# EAGLE board BeeBeeAte-RemoteBoard (EAGLE 9.6.2)
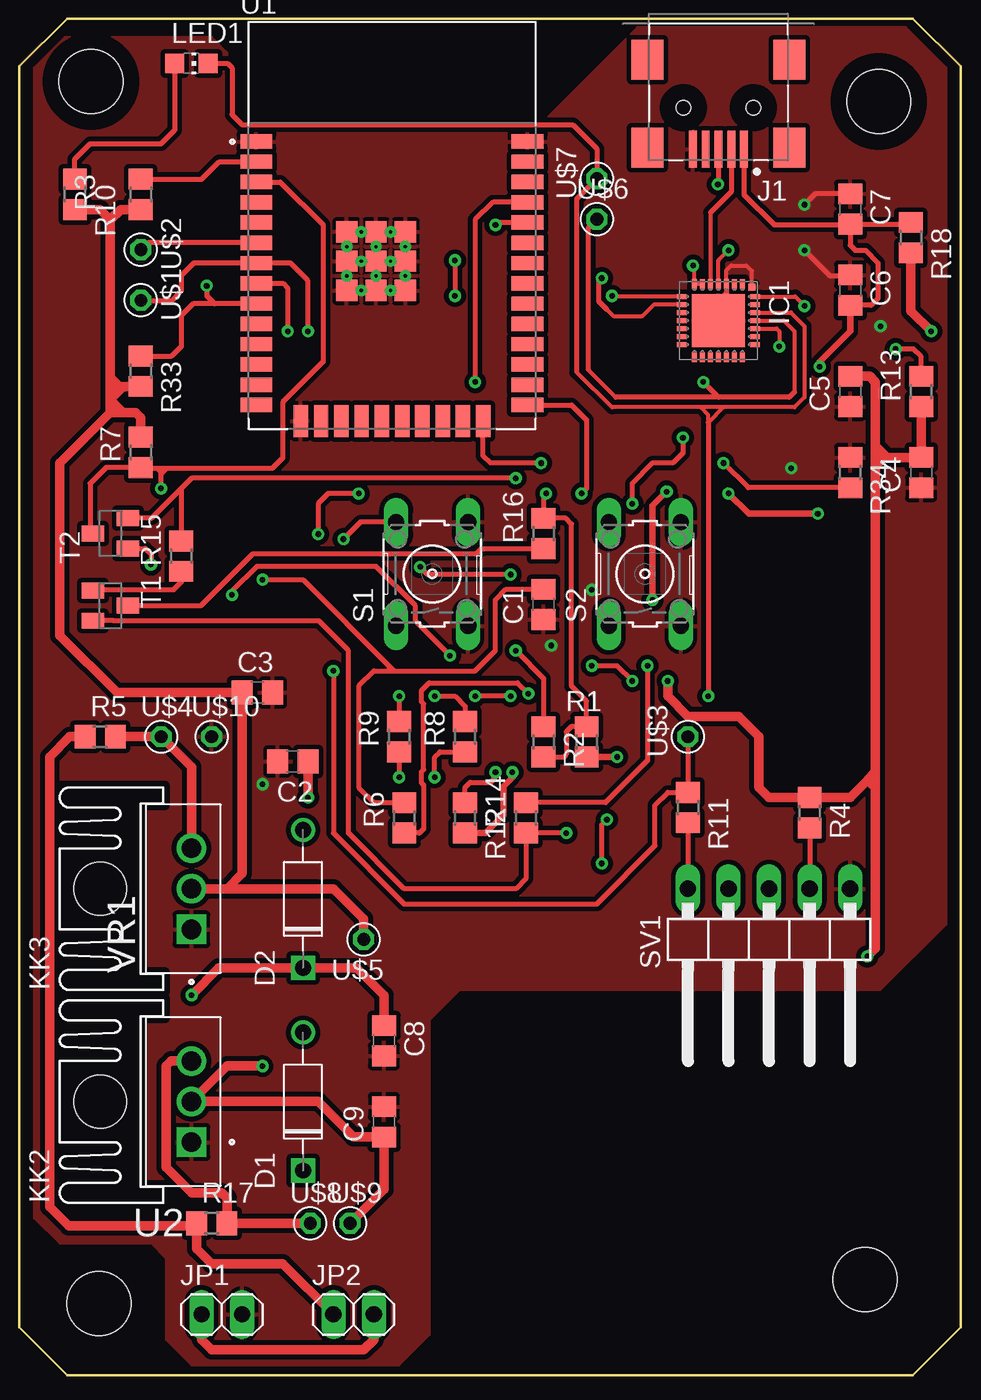
[diagram p0: board, top side]
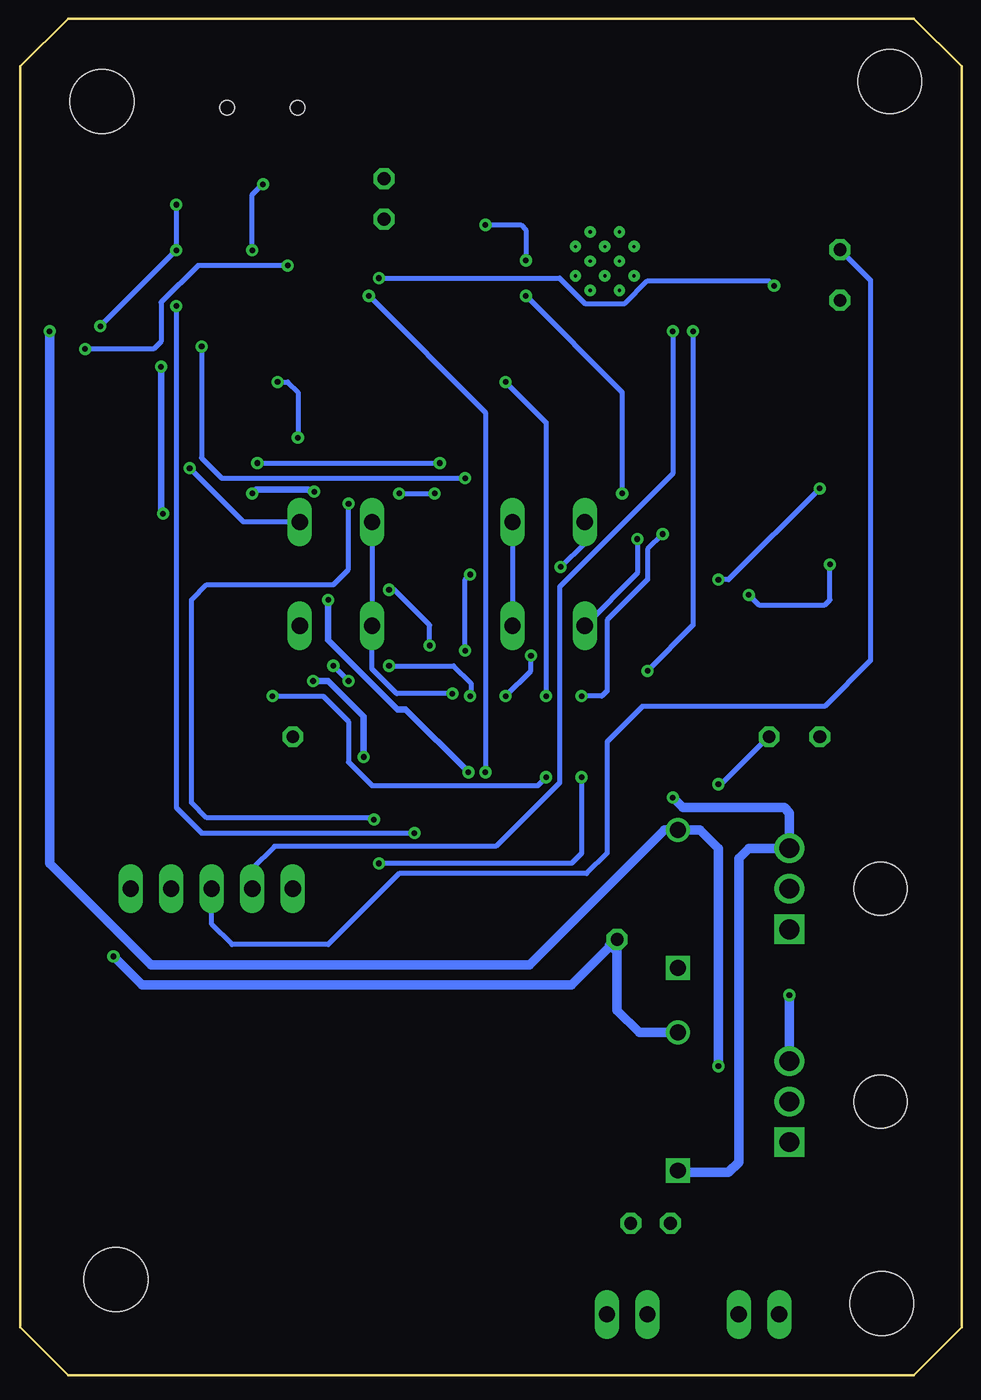
[diagram p1: board, bottom side, seen from below]

No outline drawn. Coordinates in mm, seen from the top.
Copper layers (1*16): Top 0.035mm / dielectric 1.5mm / Bottom 0.035mm
Design rules "default *": minimum track width 6mil, minimum drill 0.35mm, track to track 12mil, track to pad 12mil, pad to pad 12mil, via to via 12mil, smd to smd 12mil, copper to edge 40mil, drill to drill 12mil, minimum pad ring 10mil, minimum via ring 8mil, stop-mask expansion 4mil, vias tented up to drill 0mil, thermal gap 10mil
Holes 4 mm at 4.5,81.05 53.87,79.8 53,6 5,4.5
Milling: 8 lines

## Footprints (pad centres in the part's own frame; a part is rotated, then mirrored left to right if it is on the bottom)
C0805 = smd 1.3 x 1.5: 1 -0.95,0; 2 0.95,0
DO-41 = drill 1: A 4.325,0 | drill 1 square: C -4.325,0
MLP28 = smd 0.6 x 0.3: 1 -2.3,1.5; 2 -2.3,1; 3 -2.3,0.5; 4 -2.3,0; 5 -2.3,-0.5; 6 -2.3,-1; 7 -2.3,-1.5; 15 2.3,-1.5; 16 2.3,-1; 17 2.3,-0.5; 18 2.3,0; 19 2.3,0.5; 20 2.3,1; 21 2.3,1.5 | smd 0.3 x 0.6: 8 -1.5,-2.3; 9 -1,-2.3; 10 -0.5,-2.3; 11 0,-2.3; 12 0.5,-2.3; 13 1,-2.3; 14 1.5,-2.3; 22 1.5,2.3; 23 1,2.3; 24 0.5,2.3; 25 0,2.3; 26 -0.5,2.3; 27 -1,2.3; 28 -1.5,2.3 | smd 3.3 x 3.3: EXP 0,0 | smd 0.435 x 0.435: M -2.103,2.103
TE_3-1734035-2 = smd 0.5 x 2.3: 1 -1.6,2.6; 2 -0.8,2.6; 3 0,2.6; 4 0.8,2.6; 5 1.6,2.6 | smd 2 x 2.5: SH1 -4.45,2.5; SH2 4.45,2.5; SH3 -4.45,-3; SH4 4.45,-3 | hole 0.9: -2.2,0; 2.2,0
1X02 = drill 1.016 long: 1 -1.27,0; 2 1.27,0
SK95-2M3 = hole 3.302: 0,2.54
CHIP-LED0805 = smd 1.2 x 1.2: A 0,-1.05; C 0,1.05
R0805 = smd 1.3 x 1.5: 1 -0.95,0; 2 0.95,0
B3F-10XX = drill 1.016 long: 1 -3.251,2.261; 2 3.251,2.261; 3 -3.251,-2.261; 4 3.251,-2.261
1X05/90 = drill 1.016 long: 1 -5.08,-3.81; 2 -2.54,-3.81; 3 0,-3.81; 4 2.54,-3.81; 5 5.08,-3.81
SOT23-BEC = smd 1 x 1.4: B -0.95,-1.1; C 0,1.1; E 0.95,-1.1
MODULE_ESP32-WROOM-32 = smd 2 x 0.9: 1 -8.5,5.26; 2 -8.5,3.99; 3 -8.5,2.72; 4 -8.5,1.45; 5 -8.5,0.18; 6 -8.5,-1.09; 7 -8.5,-2.36; 8 -8.5,-3.63; 9 -8.5,-4.9; 10 -8.5,-6.17; 11 -8.5,-7.44; 12 -8.5,-8.71; 13 -8.5,-9.98; 14 -8.5,-11.25; 25 8.5,-11.25; 26 8.5,-9.98; 27 8.5,-8.71; 28 8.5,-7.44; 29 8.5,-6.17; 30 8.5,-4.9; 31 8.5,-3.63; 32 8.5,-2.36; 33 8.5,-1.09; 34 8.5,0.18; 35 8.5,1.45; 36 8.5,2.72; 37 8.5,3.99; 38 8.5,5.26 | smd 0.9 x 2: 15 -5.715,-12.25; 16 -4.445,-12.25; 17 -3.175,-12.25; 18 -1.905,-12.25; 19 -0.635,-12.25; 20 0.635,-12.25; 21 1.905,-12.25; 22 3.175,-12.25; 23 4.445,-12.25; 24 5.715,-12.25 | smd 1.33 x 1.33: 39_1 -2.835,-0.405; 39_2 -1,-0.405; 39_3 0.835,-0.405; 39_4 -2.835,-2.24; 39_5 -1,-2.24; 39_6 0.835,-2.24; 39_7 -2.835,-4.075; 39_8 -1,-4.075; 39_9 0.835,-4.075 | drill 0.2 pad 0.3: 39_10 -1.917,-0.405; 39_11 -0.083,-0.405; 39_12 -2.835,-1.323; 39_13 -1,-1.323; 39_14 0.835,-1.323; 39_15 -1.917,-2.24; 39_16 -0.083,-2.24; 39_17 -2.835,-3.158; 39_18 -1,-3.158; 39_19 0.835,-3.158; 39_20 -1.917,-4.075; 39_21 -0.083,-4.075
TO254P1054X470X1955-3 = drill 1.24 square: 1 -2.54,0 | drill 1.24: 2 0,0; 3 2.54,0
MESSPAD = drill 0.8 octagon: MSP 0,0

## Placement (x,y rotation side)
C1  100n  [C0805]  32.86,48.3 90 top
C2  1u  [C0805]  17.14,38.47 180 top
C3  1u  [C0805]  14.92,42.77 0 top
C4  10u  [C0805]  56.52,56.55 90 top
C5  100n  [C0805]  52.07,61.63 90 top
C6  10u  [C0805]  52.07,67.98 270 top
C7  100n  [C0805]  52.07,73.06 270 top
C8  1u  [C0805]  22.86,20.95 270 top
C9  1u  [C0805]  22.86,15.88 90 top
D1  1N4007  [DO-41]  17.78,17.14 90 top
D2  1N4007  [DO-41]  17.78,29.84 90 top
IC1  CP2102  [MLP28]  43.81,66.08 270 top
J1  3-1734035-2  [TE_3-1734035-2]  43.81,79.42 180 top
JP1  VOLTAGE  [1X02]  12.7,3.81 0 top
JP2  SWITCH  [1X02]  20.95,3.81 0 top
KK2  SK95-2M3  [SK95-2M3]  7.62,17.14 90 top
KK3  SK95-2M3  [SK95-2M3]  7.62,30.48 90 top
LED1  RED  [CHIP-LED0805]  10.79,82.19 270 top
R1  5.1K  [R0805]  35.56,39.69 90 top
R2  470  [R0805]  32.86,39.69 270 top
R3  0  [R0805]  7.62,73.98 270 top
R4  0  [R0805]  49.53,35.24 270 top
R5  0  [R0805]  5.08,40.01 0 top
R6  470  [R0805]  24.13,34.92 90 top
R7  12K  [R0805]  7.62,57.83 90 top
R8  470  [R0805]  27.94,40.01 90 top
R9  470  [R0805]  23.81,40.01 90 top
R10  1k  [R0805]  3.49,73.98 270 top
R11  0  [R0805]  41.91,35.56 270 top
R12  0  [R0805]  27.94,34.92 270 top
R13  0  [R0805]  56.52,61.63 90 top
R14  12k  [R0805]  31.75,34.92 90 top
R15  12k  [R0805]  10.16,51.32 90 top
R16  0  [R0805]  32.86,52.74 90 top
R17  0  [R0805]  12.06,9.53 0 top
R18  0  [R0805]  55.88,71.27 270 top
R33  4.7k  [R0805]  7.62,62.91 270 top
R34  5.1k  [R0805]  52.07,56.55 270 top
S1  BOOT  [B3F-10XX]  25.88,50.2 90 top
S2  RESET  [B3F-10XX]  39.21,50.2 90 top
SV1  JOYSTICK  [1X05/90]  46.99,26.67 180 top
T1  S8050  [SOT23-BEC]  5.71,48.22 270 top
T2  S8050  [SOT23-BEC]  5.71,52.74 90 top
U1  ESP32-WROOM-32  [MODULE_ESP32-WROOM-32]  23.36,72.04 0 top
U2  LM5.0  [TO254P1054X470X1955-3]  10.79,17.14 90 top
U$1  VRY  [MESSPAD]  7.62,67.35 0 top
U$2  VRX  [MESSPAD]  7.62,70.53 0 top
U$3  SW  [MESSPAD]  41.91,40.01 90 top
U$4  VCC  [MESSPAD]  8.89,40.01 0 top
U$5  3V3  [MESSPAD]  21.59,27.3 180 top
U$6  RXD  [MESSPAD]  36.2,72.43 0 top
U$7  TXD  [MESSPAD]  36.2,74.97 0 top
U$8  VCC  [MESSPAD]  18.24,9.53 0 top
U$9  5V  [MESSPAD]  20.73,9.53 0 top
U$10  GND  [MESSPAD]  12.06,40.01 0 top
VR1  LM3.3  [TO254P1054X470X1955-3]  10.79,30.48 90 top

## Library data of the parts
C1-C9 = rcl; SPICEPREFIX: C
D1 D2 = Diodes; CREATED_BY: PCBLayout.com; DIGIKEY_PART_NUMBER: 1N4007MSCT-ND; MANUFACTURER: Micro Commercial Co; MPN: 1N4007; PACKAGE: DO-41
IC1 = silabs; MF: FARNELL; MPN: CP2102-GM; OC_FARNELL: 9282130; OC_NEWARK: 30K5635
J1 = 3-1734035-2; AVAILABILITY: In Stock; COMMENT: 3-1734035-2; DESCRIPTION: USB Connectors MINI USB, R/A, SMT, MATTE TIN, W/O MYLAR; MF: TE Connectivity; MP: 3-1734035-2; PACKAGE: None; PRICE: None; PURCHASE-URL: https://pricing.snapeda.com/search/part/3-1734035-2/?ref=eda
JP1 JP2 SV1 = pinhead
KK2 KK3 = heatsink
LED1 = led
R1-R18 R33 R34 = rcl; SPICEPREFIX: R
S1 S2 = switch-omron; MPN: B3F-1000; OC_FARNELL: 176432; OC_NEWARK: 36M3542
T1 T2 = transistor
U1 = ESP32-WROOM-32; AVAILABILITY: In Stock; DESCRIPTION: Bluetooth, WiFi 802.11b/g/n, Bluetooth v4.2 +EDR, Class 1, 2 and 3 Transceiver Module 2.4GHz ~ 2.5GHz Antenna Not Included, U.FL Surface Mount; MF: Espressif Systems; MP: ESP32-WROOM-32; PACKAGE: Module Espressif Systems; PRICE: None; PURCHASE-URL: https://pricing.snapeda.com/search/part/ESP32-WROOM-32/?ref=eda
U2 = LM1117T-5.0; AVAILABILITY: In Stock; DESCRIPTION: 800-mA 15-V linear voltage regulator 3-TO-220 0 to 125; MF: Texas Instruments; MP: LM1117T-5.0/NOPB; PACKAGE: TO-220-3 Texas Instruments; PRICE: None; PURCHASE-URL: https://pricing.snapeda.com/search/part/LM1117T-5.0/NOPB/?ref=eda
U$1-U$10 = 03lanfra-PADS
VR1 = LM1117T-3.3; AVAILABILITY: In Stock; DESCRIPTION: 800-mA 15-V linear voltage regulator 3-TO-220 0 to 125; MF: Texas Instruments; MP: LM1117T-3.3/NOPB; PACKAGE: TO-220-3 Texas Instruments; PRICE: None; PURCHASE-URL: https://pricing.snapeda.com/search/part/LM1117T-3.3/NOPB/?ref=eda

## Nets
3V3: C3.1 C4.2 C5.2 D1.A R1.1 R3.2 R4.1 R7.2 R10.2 R13.1 R33.2 U$5.MSP VR1.2
5V: C9.1 D2.A R18.2 U2.2 U$9.MSP
CRST: IC1.9 R33.1 U1.9
D+: IC1.4 J1.3
D-: IC1.5 J1.2
DTR: IC1.28 R14.1 T1.E
ENC: C1.2 R6.2 R7.1 T2.C U1.3
GND: C1.1 C2.2 C3.2 C4.1 C5.1 C6.1 C7.1 C8.2 C9.2 IC1.3 IC1.EXP IC1.M J1.5 JP1.2 R34.1 S1.3 S1.4 S2.3 S2.4 SV1.1 U1.1 U1.15 U1.38 U1.39_1 U1.39_2 U1.39_3 U1.39_4 U1.39_5 U1.39_6 U1.39_7 U1.39_8 U1.39_9 U1.39_10 U1.39_11 U1.39_12 U1.39_13 U1.39_14 U1.39_15 U1.39_16 U1.39_17 U1.39_18 U1.39_19 U1.39_20 U1.39_21 U2.1 U$10.MSP VR1.1
N$1: R2.1 S1.1 S1.2
N$2: R6.1 S2.1 S2.2
N$3: C8.1 D2.C R17.2 U2.3 U$8.MSP
N$4: C2.1 D1.C R5.2 U$4.MSP VR1.3
N$5: JP1.1 JP2.2
N$6: IC1.25 R9.1 U$6.MSP
N$7: LED1.A R10.1
N$8: R4.2 SV1.2
N$9: IC1.26 LED1.C R8.1 U$7.MSP
N$10: IC1.6 IC1.7 R13.2
N$11: IC1.8 R12.1
N$12: R14.2 T2.B
N$13: R11.2 SV1.5
N$14: R15.1 T1.B
N$15: R3.1 U1.2
N$25: R34.2 U1.24
PIN0: R1.2 R2.2 R16.2 U1.25
PIN1: R16.1 T1.C
RTS: IC1.24 R15.2 T2.E
RXD: R9.2 U1.34
SW: R11.1 U1.8 U$3.MSP
TXD: R8.2 U1.35
VBUS: C6.2 C7.2 J1.1 R12.2 R18.1
VCC: JP2.1 R5.1 R17.1
VRX: SV1.3 U1.6 U$2.MSP
VRY: SV1.4 U1.7 U$1.MSP

## Tracks (layer width: path | path; a pad name or v marks a point on that pad's centre or on a via)
3V3  (via drill 0.35)
  Top 0.305: 13.02,30.48 VR1.2 | R4.1 | R1.1
  Top 0.406: v37.47,38.73 R1.1 | 53.66,36.67 53.18,37.15 53.18,37.31
  Top 0.61: 5.71,62.55 6.31,61.95 | 6.31,61.95 6.43,61.83 5.71,61.12 | 6.31,61.95 R33.2 | 5.71,62.55 5.71,61.12 | 5.71,61.12 5.71,60.33 | 13.02,30.48 13.97,31.43 C3.1 | VR1.2 19.68,30.48 21.59,28.57 U$5.MSP | 53.66,58.26 53.66,62.23 53.3,62.59 C5.2 | 53.66,58.26 53.66,56.99 | 53.66,56.99 53.66,37.78 | R4.1 52.07,36.19 53.18,37.31 53.66,37.78 | R4.1 46.99,36.2 46.35,36.83 46.35,40.01 45.09,41.27 41.91,41.27 40.64,42.55 v40.64,43.5 | 5.71,60.33 2.54,57.15 2.54,46.35 6.13,42.77 C3.1 | 53.66,37.78 53.66,36.67 53.66,26.75 v53.15,26.24 | 5.71,60.33 6.51,60.33 | 6.51,60.33 7.3,60.33 7.62,60.01 R7.2 | R13.1 C4.2 54.41,57.51 | 6.51,60.33 5.71,61.12 | 54.41,57.51 53.66,58.26 | 54.41,57.51 54.17,57.51 | 54.13,57.47 53.66,56.99 | C3.1 | 5.71,72.39 5.71,62.55 | R10.2 5.07,73.03 5.71,72.39 | R3.2 6.36,73.03 5.71,72.39
  Bottom 0.305: 22.23,26.99 21.59,26.35 21.59,25.72
  Bottom 0.406: v40.64,43.5 39.69,43.5 37.47,41.27 v37.47,38.73
  Bottom 0.61: D1.A 20.2,21.47 21.59,22.86 21.59,25.72 U$5.MSP 24.45,24.45 51.36,24.45 v53.15,26.24
5V  (via drill 0.35)
  Top 0.305: C9.1
  Top 0.61: C9.1 20.95,14.92 18.73,17.14 U2.2 13.02,19.37 v15.24,19.37 | C9.1 22.86,11.65 U$9.MSP | v57.15,65.41 55.88,66.67 R18.2
  Bottom 0.61: v15.24,19.37 15.24,33.02 16.39,34.17 D2.A 18.62,34.17 27.08,25.72 50.8,25.72 57.15,32.07 v57.15,65.41
CRST  (via drill 0.35)
  Top 0.254: IC1.9 39.77,67.08 39.05,66.36 37.24,66.36 36.8,66.79
  Top 0.305: 36.8,66.79 36.31,67.28 36.31,68.54 v36.51,68.74 | v11.75,68.26 11.75,67.63 12.23,67.14 | R33.1 9.56,63.85 10.16,64.45 10.16,66.39 10.9,67.14 12.23,67.14 | U1.9 12.23,67.14
  Bottom 0.305: v36.51,68.74 25.2,68.74 23.61,67.15 21.11,67.15 19.68,68.58 12.06,68.58 v11.75,68.26
D+  (via drill 0.35)
  Top 0.254: IC1.4 43.81,69.85 v44.45,70.48
  Top 0.305: J1.3 43.81,74.65 v43.78,74.61
  Bottom 0.305: v44.45,70.48 44.45,73.98 43.81,74.61 v43.78,74.61
D-
  Top 0.254: 43.31,72.84 IC1.5
  Top 0.305: J1.2 44.62,74.14 43.31,72.84
DTR  (via drill 0.35)
  Top 0.254: IC1.28 48.62,67.58 v49.21,66.99
  Top 0.305: v34.29,33.97 R14.1 31.75,31.11 31.11,30.48 24.13,30.48 20.64,33.97 20.64,45.4 18.78,47.26 5.93,47.26 5.92,47.27 T1.E
  Bottom 0.305: v49.21,66.99 49.21,35.56 47.62,33.97 v34.29,33.97
ENC  (via drill 0.35)
  Top 0.305: T2.C 4.45,52.91 4.45,55.88 5.44,56.88 R7.1 7.69,56.81 8.67,56.81 | 23.18,44.13 22.23,44.13 21.27,43.18 21.27,36.83 22.23,35.88 R6.2 | 23.18,44.13 23.5,44.13 | 23.5,44.13 28.57,44.13 29.84,45.4 29.84,48.58 30.52,49.25 C1.2 | U1.3 16.36,74.76 19.05,72.07 19.05,63.5 16.51,60.96 16.51,57.47 15.85,56.81 9.21,56.81 | 9.21,56.81 8.89,56.81 | 8.89,56.81 8.67,56.81 | v15.24,49.85 17.78,49.85 23.18,44.45 | 23.18,44.45 23.5,44.13 | 23.18,44.45 23.18,44.13 | v8.89,55.56 8.89,56.4 8.89,56.59 | 8.89,56.59 8.89,56.81 | 8.9,56.5 9.21,56.81 | 8.89,56.59 8.67,56.81
  Bottom 0.305: v8.89,55.56 14.61,49.85 v15.24,49.85
GND  (via drill 0.35)
  Top 0.254: IC1.M 45.92,69.18 45.56,69.53 44.61,69.53 44.31,69.24 IC1.3
  Top 0.305: IC1.3 44.31,67.78 | 44.31,67.78 44.31,67.49 44.13,67.31 44.13,67.6 | 44.31,67.78 44.13,67.6 | IC1.EXP 43.81,67.28 44.13,67.6 | C7.1 49.88,74.02 v49.21,73.34 | v49.21,70.48 50.8,68.9 52.03,68.9 C6.1
  Bottom 0.305: S2.4 45,53.46 v48.38,56.83 | U$10.MSP 15.04,37.03 v15.24,37.03 | v33.34,45.72 33.34,46.99 35.56,49.21 v35.88,49.21 | S1.4 S1.3 | v49.21,73.34 v49.21,70.48 v53.98,65.72
  pour Top (isolate 0.305): 0.95,78.42 0.95,9.84 2.54,8.26 8.26,8.26 9.21,7.3 9.21,2.22 10.79,0.64 11.11,0.64 23.81,0.64 25.72,2.54 25.72,22.23 27.62,24.13 53.98,24.13 58.1,28.26 58.1,81.92 55.56,84.45 38.73,84.45 32.7,78.42 13.65,78.42 13.02,79.06 13.02,82.87 12.06,83.82 2.86,83.82 0.95,81.92
N$1  (via drill 0.35)
  Top 0.305: v30.8,50.16 25.6,50.16 v25.13,50.64 | v31.11,45.4 32.86,43.66 R2.1 | S1.2 21.39,53.46 v20.32,52.39
  Bottom 0.305: v31.11,45.4 31.11,49.85 v30.8,50.16 | v20.32,52.39 20.32,50.25 S1.1 | v25.13,50.64 23.61,52.15 S1.2
N$2  (via drill 0.35)
  Top 0.305: v31.91,42.7 31.23,43.38 25.69,43.38 25.2,42.89 25.2,42.2 25.34,42.06 25.34,37.95 25.2,37.81 25.2,37.12 25.34,36.98 25.34,34.23 25.08,33.97 R6.1
  Bottom 0.305: v31.91,42.7 35.4,42.7 36.95,44.25 S2.1 S2.2
N$3  (via drill 0.35)
  Top 0.61: U2.3 9.53,19.68 9.21,19.37 9.21,13.02 10.79,11.43 12.7,11.43 13.02,11.12 R17.2 U$8.MSP | v10.79,23.81 12.5,25.52 D2.C 21.15,25.52 22.86,23.81 C8.1
  Bottom 0.61: U2.3 v10.79,23.81
N$4  (via drill 0.35)
  Top 0.305: v18.1,36.2 v18.09,36.2
  Top 0.61: VR1.3 10.79,38.1 U$4.MSP R5.2 | v18.09,36.2 C2.1
  Bottom 0.305: 17.66,12.7 D1.C
  Bottom 0.61: v18.1,36.2 17.46,35.56 11.11,35.56 10.79,35.24 VR1.3 13.34,33.02 13.97,32.38 13.97,13.34 14.61,12.7 17.66,12.7
N$5
  Top 0.61: JP1.1 11.43,2.22 12.06,1.59 21.59,1.59 22.23,2.22 JP2.2
N$6  (via drill 0.35)
  Top 0.254: IC1.25 47.9,66.08 48.58,65.41 48.58,61.59 | 37.38,61.28 35.67,62.98
  Top 0.305: 48.58,61.59 48.26,61.28 43.81,61.28 | 43.81,61.28 37.38,61.28 | 35.67,62.98 35.67,71.91 U$6.MSP | 43.81,61.28 v42.86,62.23 | v41.59,58.74 41.59,57.78 40.96,57.15 39.69,57.15 38.42,55.88 v38.42,54.61 | R9.1 v23.81,37.47 | v36.51,32.07 36.51,34.49 v36.83,34.81
  Bottom 0.305: v42.86,62.23 42.23,62.23 41.59,61.59 v41.59,58.74 | v23.81,37.47 23.81,32.7 24.45,32.07 v36.51,32.07 | v36.83,34.81 36.95,34.92 47.31,34.92 48.26,35.88 48.26,48.58 47.31,49.53 39.37,49.53 38.42,50.48 v38.42,54.61
N$7
  Top 0.305: LED1.A 9.74,78.01 8.89,77.15 4.45,77.15 3.49,76.2 R10.1
N$8
  Top 0.305: R4.2 SV1.2
N$9  (via drill 0.35)
  Top 0.254: IC1.26 48.35,66.58 49.21,65.72 49.21,61.28 48.58,60.64 44.13,60.64 | 44.13,60.64 42.7,60.64 | 42.7,60.64 37.15,60.64 34.92,62.87 | 44.13,60.64 43.18,59.69 43.18,60.17 42.7,60.64
  Top 0.305: 43.18,59.69 v43.18,42.55 | v26.04,37.47 26.04,38.73 26.36,39.05 R8.1 | 34.92,62.87 34.92,73.7 U$7.MSP 36.2,76.83 34.69,78.34 13.98,78.34 13.34,78.98 13.34,81.92 13.06,82.19 LED1.C
  Bottom 0.305: v43.18,42.55 40.01,42.55 38.42,40.96 38.42,38.42 36.95,36.95 26.55,36.95 v26.04,37.47
N$10  (via drill 0.35)
  Top 0.254: IC1.7 42.31,69.44 v42.23,69.53
  Top 0.305: IC1.6 IC1.7 | R13.2 56.52,63.82 56.04,64.29 v54.93,64.29
  Bottom 0.305: v42.23,69.53 47.85,69.53 50.16,67.22 50.16,64.77 50.64,64.29 v54.93,64.29
N$11  (via drill 0.35)
  Top 0.254: IC1.8 37.2,67.58
  Top 0.305: R12.1 27.94,36.83 28.26,37.15 29.53,37.15 29.84,37.47 v29.84,37.78 | 37.2,67.58 v37.15,67.63
  Bottom 0.305: v37.15,67.63 29.84,60.33 v29.84,37.78
N$12  (via drill 0.35)
  Top 0.305: v39.37,44.45 39.37,38.51 36.74,35.88 R14.2 | v38.42,43.5 37.47,44.45 v35.88,44.45 | v30.8,42.55 v28.57,42.55 | v26.99,45.09 24.83,47.24 24.83,48.22 22.37,50.68 14.89,50.68 13.34,49.12 v13.34,48.9 | v8.26,50.8 8.26,51.44 7.89,51.8 T2.B
  Bottom 0.305: v39.37,44.45 v38.42,43.5 | v30.8,42.55 30.76,42.59 30.76,43.37 31.84,44.45 v35.88,44.45 | v28.57,42.55 26.99,44.13 v26.99,45.09 | v13.34,48.9 12.7,48.26 8.57,48.26 8.26,48.58 v8.26,50.8
N$13
  Top 0.305: R11.2 SV1.5
N$14
  Top 0.305: T1.B 4.66,49.21 9.68,49.21 10.16,49.69 R15.1
N$15
  Top 0.305: U1.2 12.53,76.03 11.43,74.93 11.43,74.94 R3.1
N$25  (via drill 0.35)
  Top 0.305: R34.2 45.68,55.6 v44.13,57.15 | v32.7,57.15 29.53,57.15 29.07,57.6 U1.24
  Bottom 0.305: v44.13,57.15 v32.7,57.15
PIN0  (via drill 0.35)
  Top 0.305: v35.24,55.24 35.56,55.56 35.56,59.85 34.62,60.79 U1.25 | v33.02,55.24 32.86,55.09 R16.2 34.25,53.7 34.61,53.34 34.61,43.18 35.56,42.23 R1.2 34.6,40.64 34.29,40.32 34.29,38.89 34.13,38.73 34.13,38.74 R2.2
  Bottom 0.305: v35.24,55.24 v33.02,55.24
PIN1
  Top 0.305: T1.C 11.39,48.22 14.64,51.48 28.64,51.48 28.96,51.8 R16.1
RTS  (via drill 0.35)
  Top 0.254: IC1.24 47.45,65.58 47.62,65.41 v47.62,64.45
  Top 0.305: v31.11,56.2 10.79,56.2 10.16,55.56 | 10.16,55.56 R15.2 | 10.16,55.56 8.29,53.7 T2.E
  Bottom 0.305: v47.62,64.45 47.62,57.47 46.35,56.2 v31.11,56.2
RXD  (via drill 0.35)
  Top 0.305: R9.2 v23.81,42.55 | U1.34 29.99,72.22 v29.84,72.07 | v27.3,69.85 v27.3,67.63 | v21.27,55.24 19.37,55.24 18.73,54.61 v18.73,52.7
  Bottom 0.305: v29.84,72.07 27.62,72.07 27.3,71.75 v27.3,69.85 | v27.3,67.63 21.27,61.59 v21.27,55.24 | v18.73,52.7 19.68,51.75 19.68,49.85 22.23,47.31 22.23,42.86 22.54,42.55 v23.81,42.55
SW  (via drill 0.35)
  Top 0.305: U$3.MSP R11.1 | R11.1 | v19.68,44.13 19.68,33.97 24.13,29.53 36.2,29.53 39.85,33.18 39.85,35.72 40.64,36.51 R11.1 | U1.8 16.52,68.41 16.83,68.1 v16.83,65.41
  Bottom 0.305: v16.83,65.41 16.83,46.99 v19.68,44.13
TXD  (via drill 0.35)
  Top 0.305: U1.35 29.68,73.49 28.57,72.39 v28.57,62.23 | v26.04,42.55 27.3,42.55 27.94,41.91 R8.2
  Bottom 0.305: v28.57,62.23 26.04,59.69 v26.04,42.55
VBUS  (via drill 0.35)
  Top 0.305: J1.1 45.41,73.97 47.31,72.07 52.03,72.07 C7.2 | C7.2 55.77,72.11 R18.1 | C7.2 52.07,70.8 52.39,70.48 53.02,70.48 53.82,69.69 53.82,67.47 53.38,67.03 C6.2
  Top 0.406: R12.2 29.21,33.98 30.33,35.1 30.33,36.89 30.91,37.47 v30.91,37.78 | v39.69,48.58 39.69,54.48 v40.57,55.36 | v44.45,55.24 45.72,53.98 v50.05,53.98 | v50.16,63.18 50.16,63.5 52.07,65.41 C6.2
  Bottom 0.406: v39.69,48.58 39.69,46.06 35.36,41.73 34.85,41.73 v30.91,37.78 | v40.57,55.36 40.82,55.36 40.95,55.49 44.21,55.49 v44.45,55.24 | v50.05,53.98 50.16,54.09 v50.16,63.18
VCC
  Top 0.305: 10.96,9.37 R17.1
  Top 0.61: 10.96,9.37 3.09,9.37 1.91,10.55 1.91,38.73 3.17,40.01 R5.1 | JP2.1 16.51,6.99 12.06,6.99 11.12,7.93 R17.1
VRX
  Top 0.305: U1.6 8.04,70.95 U$2.MSP
  Bottom 0.305: U$2.MSP 5.71,68.62 5.71,60.33 5.71,44.77 8.57,41.91 20,41.91 22.23,39.69 22.23,32.7 23.5,31.43 35.24,31.43 39.69,26.99 45.72,26.99 46.99,28.26 SV1.3
VRY  (via drill 0.35)
  Top 0.305: U$1.MSP 7.66,67.31 9.53,67.31 10.16,67.94 10.16,68.9 10.94,69.68 U1.7 17,69.68 18.1,68.58 v18.1,65.41
  Bottom 0.305: SV1.4 44.45,31.75 43.06,33.14 29.18,33.14 25.2,37.12 25.2,49.38 18.1,56.49 v18.1,65.41

## Text on the board
tValues: - | + | - | +
bValues: Francesco Lanthaler / BeeBeeAte Fernsteuerung - 1. Board / 5AEL TFO Meran 2021/22